# EAGLE board CT_schematic (EAGLE 7.6.0)

Size 100 x 80 mm. Coordinates in mm from the lower left corner, seen from the top.
Outline: 0,0 100,0 100,80 0,80 0,0
Copper layers (1*16): Top 0.035mm / dielectric 1.5mm / Bottom 0.035mm
Design rules "default": minimum track width 10mil, minimum drill 24mil, track to track 8mil, track to pad 8mil, pad to pad 8mil, via to via 8mil, smd to smd 8mil, copper to edge 40mil, drill to drill 8mil, minimum pad ring 10mil, minimum via ring 8mil, stop-mask expansion 4mil, vias tented up to drill 0mil, thermal gap 10mil

## Footprints (pad centres in the part's own frame; a part is rotated, then mirrored left to right if it is on the bottom)
C0603 = smd 0.8 x 0.8: 1 -0.762,0; 2 0.762,0
C0402 = smd 0.5 x 0.5: 1 -0.508,0; 2 0.508,0
C1206 = smd 1.3 x 1.6: 1 -1.524,0; 2 1.524,0
C0805 = smd 1.2 x 1.3: 1 -1.016,0; 2 1.016,0
C1210 = smd 1.2 x 2.5: 1 -1.524,0; 2 1.524,0
EXV-9H = smd 3.505 x 1.676: 1 -2.857,0; 2 2.857,0
L0603 = smd 0.8 x 0.8: 1 -0.762,0; 2 0.762,0
PJ-037B_PACKAGE = drill 3.7 square: 1 12,0 | drill 3.2 square: 2 6,0
R0603 = smd 0.8 x 0.8: 1 -0.762,0; 2 0.762,0
UFBGA176_25 = smd 0.3 x 0.3: A1 -4.55,4.55; A2 -3.9,4.55; A3 -3.25,4.55; A4 -2.6,4.55; A5 -1.95,4.55; A6 -1.3,4.55; A7 -0.65,4.55; A8 0,4.55; A9 0.65,4.55; A10 1.3,4.55; A11 1.95,4.55; A12 2.6,4.55; A13 3.25,4.55; A14 3.9,4.55; A15 4.55,4.55; B1 -4.55,3.9; B2 -3.9,3.9; B3 -3.25,3.9; B4 -2.6,3.9; B5 -1.95,3.9; B6 -1.3,3.9; B7 -0.65,3.9; B8 0,3.9; B9 0.65,3.9; B10 1.3,3.9; B11 1.95,3.9; B12 2.6,3.9; B13 3.25,3.9; B14 3.9,3.9; B15 4.55,3.9; C1 -4.55,3.25; C2 -3.9,3.25; C3 -3.25,3.25; C4 -2.6,3.25; C5 -1.95,3.25; C6 -1.3,3.25; C7 -0.65,3.25; C8 0,3.25; C9 0.65,3.25; C10 1.3,3.25; C11 1.95,3.25; C12 2.6,3.25; C13 3.25,3.25; C14 3.9,3.25; C15 4.55,3.25; D1 -4.55,2.6; D2 -3.9,2.6; D3 -3.25,2.6; D4 -2.6,2.6; D5 -1.95,2.6; D6 -1.3,2.6; D7 -0.65,2.6; D8 0,2.6; D9 0.65,2.6; D10 1.3,2.6; D11 1.95,2.6; D12 2.6,2.6; D13 3.25,2.6; D14 3.9,2.6; D15 4.55,2.6; E1 -4.55,1.95; E2 -3.9,1.95; E3 -3.25,1.95; E4 -2.6,1.95; E12 2.6,1.95; E13 3.25,1.95; E14 3.9,1.95; E15 4.55,1.95; F1 -4.55,1.3; F2 -3.9,1.3; F3 -3.25,1.3; F4 -2.6,1.3; F6 -1.3,1.3; F7 -0.65,1.3; F8 0,1.3; F9 0.65,1.3; F10 1.3,1.3; F12 2.6,1.3; F13 3.25,1.3; F14 3.9,1.3; F15 4.55,1.3; G1 -4.55,0.65; G2 -3.9,0.65; G3 -3.25,0.65; G4 -2.6,0.65; G6 -1.3,0.65; G7 -0.65,0.65; G8 0,0.65; G9 0.65,0.65; G10 1.3,0.65; G12 2.6,0.65; G13 3.25,0.65; G14 3.9,0.65; G15 4.55,0.65; H1 -4.55,0; H2 -3.9,0; H3 -3.25,0; H4 -2.6,0; H6 -1.3,0; H7 -0.65,0; H8 0,0; H9 0.65,0; H10 1.3,0; H12 2.6,0; H13 3.25,0; H14 3.9,0; H15 4.55,0; J1 -4.55,-0.65; J2 -3.9,-0.65; J3 -3.25,-0.65; J4 -2.6,-0.65; J6 -1.3,-0.65; J7 -0.65,-0.65; J8 0,-0.65; J9 0.65,-0.65; J10 1.3,-0.65; J12 2.6,-0.65; J13 3.25,-0.65; J14 3.9,-0.65; J15 4.55,-0.65; K1 -4.55,-1.3; K2 -3.9,-1.3; K3 -3.25,-1.3; K4 -2.6,-1.3; K6 -1.3,-1.3; K7 -0.65,-1.3; K8 0,-1.3; K9 0.65,-1.3; K10 1.3,-1.3; K12 2.6,-1.3; K13 3.25,-1.3; K14 3.9,-1.3; K15 4.55,-1.3; L1 -4.55,-1.95; L2 -3.9,-1.95; L3 -3.25,-1.95; L4 -2.6,-1.95; L12 2.6,-1.95; L13 3.25,-1.95; L14 3.9,-1.95; L15 4.55,-1.95; M1 -4.55,-2.6; M2 -3.9,-2.6; M3 -3.25,-2.6; M4 -2.6,-2.6; M5 -1.95,-2.6; M6 -1.3,-2.6; M7 -0.65,-2.6; M8 0,-2.6; M9 0.65,-2.6; M10 1.3,-2.6; M11 1.95,-2.6; M12 2.6,-2.6; M13 3.25,-2.6; M14 3.9,-2.6; M15 4.55,-2.6; N1 -4.55,-3.25; N2 -3.9,-3.25; N3 -3.25,-3.25; N4 -2.6,-3.25; N5 -1.95,-3.25; N6 -1.3,-3.25; N7 -0.65,-3.25; N8 0,-3.25; N9 0.65,-3.25; N10 1.3,-3.25; N11 1.95,-3.25; N12 2.6,-3.25; N13 3.25,-3.25; N14 3.9,-3.25; N15 4.55,-3.25; P1 -4.55,-3.9; P2 -3.9,-3.9; P3 -3.25,-3.9; P4 -2.6,-3.9; P5 -1.95,-3.9; P6 -1.3,-3.9; P7 -0.65,-3.9; P8 0,-3.9; P9 0.65,-3.9; P10 1.3,-3.9; P11 1.95,-3.9; P12 2.6,-3.9; P13 3.25,-3.9; P14 3.9,-3.9; P15 4.55,-3.9; R1 -4.55,-4.55; R2 -3.9,-4.55; R3 -3.25,-4.55; R4 -2.6,-4.55; R5 -1.95,-4.55; R6 -1.3,-4.55; R7 -0.65,-4.55; R8 0,-4.55; R9 0.65,-4.55; R10 1.3,-4.55; R11 1.95,-4.55; R12 2.6,-4.55; R13 3.25,-4.55; R14 3.9,-4.55; R15 4.55,-4.55
SAMTEC_FTSH-105-01-L-DV-K = smd 0.762 x 2.794: 1 -2.54,-2.032; 2 -2.54,2.032; 3 -1.27,-2.032; 4 -1.27,2.032; 5 0,-2.032; 6 0,2.032; 7 1.27,-2.032; 8 1.27,2.032; 9 2.54,-2.032; 10 2.54,2.032
RFM75-S = smd 0.85 x 1.6: 1 1.7,0.8; 2 2.97,0.8; 3 4.24,0.8; 4 5.51,0.8; 5 6.78,0.8; 6 8.05,0.8; 7 9.32,0.8; 8 10.59,0.8
S29VS256RABBHW000 = smd 0.3 x 0.3: A1 -6,3; A14 0.5,3; C3 -5,2; C4 -4.5,2; C5 -4,2; C6 -3.5,2; C7 -3,2; C8 -2.5,2; C9 -2,2; C10 -1.5,2; C11 -1,2; C12 -0.5,2; D3 -5,1.5; D4 -4.5,1.5; D5 -4,1.5; D6 -3.5,1.5; D7 -3,1.5; D8 -2.5,1.5; D9 -2,1.5; D10 -1.5,1.5; D11 -1,1.5; D12 -0.5,1.5; E3 -5,1; E4 -4.5,1; E5 -4,1; E6 -3.5,1; E7 -3,1; E8 -2.5,1; E9 -2,1; E10 -1.5,1; E11 -1,1; E12 -0.5,1; F3 -5,0.5; F4 -4.5,0.5; F5 -4,0.5; F6 -3.5,0.5; F7 -3,0.5; F8 -2.5,0.5; F9 -2,0.5; F10 -1.5,0.5; F11 -1,0.5; F12 -0.5,0.5; H1 -6,-0.5; H14 0.5,-0.5
88-00153-02 = smd 1.6 x 1.6: 1 -0.2,0; 13 15,0; 20 15,9.2; 32 -0.2,9.2 | smd 0.8 x 1.6: 2 1.4,0; 3 2.6,0; 4 3.8,0; 5 5,0; 6 6.2,0; 7 7.4,0; 8 8.6,0; 9 9.8,0; 10 11,0; 11 12.2,0; 12 13.4,0; 21 13.4,9.2; 22 12.2,9.2; 23 11,9.2; 24 9.8,9.2; 25 8.6,9.2; 26 7.4,9.2; 27 6.2,9.2; 28 5,9.2; 29 3.8,9.2; 30 2.6,9.2; 31 1.4,9.2; 49 17.8,0 | smd 1.6 x 0.8: 14 15,1.6; 15 15,2.8; 16 15,4; 17 15,5.2; 18 15,6.4; 19 15,7.6; 33 -0.2,7.6; 34 -0.2,6.4; 35 -0.2,5.2; 36 -0.2,4; 37 -0.2,2.8; 38 -0.2,1.6 | smd 2 x 2: 39 3.5,3; 40 7.4,3; 41 11.3,3; 42 11.3,6.2; 43 7.4,6.2; 44 3.5,6.2 | smd 0.5 x 0.5: 45 1.55,3.85; 46 1.55,2.75; 47 1.55,1.65 | smd 0.8 x 0.8: 48 16.6,-0.4
ABLS-25.000MHZ-B2F-T = smd 5.6 x 2.8: 1 -3.81,0; 2 5.69,0
ASEK = smd 1.4 x 1: 1 -1.1,-0.8; 2 1.1,-0.8; 3 1.1,0.8; 4 -1.1,0.8
WSON-8 = smd 0.3 x 0.6: 1 -0.75,0; 2 0.05,0; 3 0.85,0; 4 1.65,0; 5 1.65,3.8; 6 0.85,3.8; 7 0.05,3.8; 8 -0.75,3.8 | smd 3 x 2.6: PAD 0.45,1.9
SON-6 = smd 0.55 x 0.3: 1 -0.355,0.5 | smd 0.52 x 0.3: 2 -0.37,0; 3 -0.37,-0.5; 4 0.37,-0.5; 5 0.37,0; 6 0.37,0.5
RUT0012A = smd 0.7 x 0.2: 1 -0.7,0.8; 2 -0.7,0.4; 3 -0.7,0; 4 -0.7,-0.4; 5 -0.7,-0.8; 7 0.7,-0.8; 8 0.7,-0.4; 9 0.7,0; 10 0.7,0.4; 11 0.7,0.8 | smd 0.2 x 0.7: 6 0,-0.85; 12 0,0.85
SW_4-1437565-2 = smd 1.4 x 2.1: 1 -2.23,4.55; 2 -2.23,-4.55; 3 2.23,4.55; 4 2.23,-4.55
LGM67K-G1J2-24-Z = smd 0.8 x 1.4: A -2,0; C 0,0
NC7SZ125M5X = smd 1.3 x 0.7: 1 -1.3,0.95; 2 -1.3,0; 3 -1.3,-0.95; 4 1.3,-0.95; 5 1.3,0.95

## Placement (x,y rotation side)
C1  1e-06  [C0603]  -58.42,81.28 0 top  (outside the outline)
C2  1e-07  [C0603]  -62.23,81.28 0 top  (outside the outline)
C3  1e-07  [C0603]  -66.04,81.28 0 top  (outside the outline)
C4  1e-07  [C0603]  -69.85,81.28 0 top  (outside the outline)
C5  1e-07  [C0603]  -73.66,81.28 0 top  (outside the outline)
C6  1e-07  [C0603]  -77.47,81.28 0 top  (outside the outline)
C7  1e-07  [C0603]  -81.28,81.28 0 top  (outside the outline)
C8  1e-07  [C0603]  -15.24,86.36 0 top  (outside the outline)
C9  1e-07  [C0603]  -19.05,86.36 0 top  (outside the outline)
C10  1e-07  [C0603]  -22.86,86.36 0 top  (outside the outline)
C11  1e-07  [C0603]  -26.67,86.36 0 top  (outside the outline)
C12  1e-07  [C0603]  -30.48,86.36 0 top  (outside the outline)
C13  1e-07  [C0603]  -34.29,86.36 0 top  (outside the outline)
C14  1e-07  [C0603]  -38.1,86.36 0 top  (outside the outline)
C15  1e-07  [C0603]  -41.91,86.36 0 top  (outside the outline)
C16  1e-07  [C0603]  -45.72,86.36 0 top  (outside the outline)
C17  4.7e-06  [C0603]  -39.37,81.28 0 top  (outside the outline)
C18  1e-08  [C0603]  -49.53,86.36 0 top  (outside the outline)
C19  1e-06  [C0603]  -53.34,86.36 0 top  (outside the outline)
C20  2.2e-06  [C0603]  -43.18,81.28 0 top  (outside the outline)
C21  2.2e-06  [C0603]  -46.99,81.28 0 top  (outside the outline)
C22  1e-11  [C0402]  -38.1,91.44 0 top  (outside the outline)
C23  1e-11  [C0402]  -41.91,91.44 0 top  (outside the outline)
C24  1e-07  [C0402]  -45.72,91.44 0 top  (outside the outline)
C25  1e-07  [C0402]  -49.53,91.44 0 top  (outside the outline)
C26  1e-06  [C0603]  -57.15,86.36 0 top  (outside the outline)
C27  1e-07  [C0402]  -53.34,91.44 0 top  (outside the outline)
C28  2.2e-06  [C0603]  -50.8,81.28 0 top  (outside the outline)
C29  1e-07  [C0402]  -57.15,91.44 0 top  (outside the outline)
C30  2.2e-06  [C0603]  -54.61,81.28 0 top  (outside the outline)
C31  1e-07  [C0402]  -60.96,91.44 0 top  (outside the outline)
C32  1e-06  [C0603]  -60.96,86.36 0 top  (outside the outline)
C33  1e-07  [C0402]  -64.77,91.44 0 top  (outside the outline)
C34  1e-06  [C0603]  -64.77,86.36 0 top  (outside the outline)
C35  1e-08  [C0402]  -68.58,91.44 0 top  (outside the outline)
C36  1e-08  [C0402]  -72.39,91.44 0 top  (outside the outline)
C37  1e-05  [C1206]  -55.88,62.23 0 top  (outside the outline)
C38  1e-05  [C0805]  -21.59,69.85 0 top  (outside the outline)
C39  1e-08  [C0402]  -76.2,91.44 0 top  (outside the outline)
C40  1e-05  [C1206]  -62.23,62.23 0 top  (outside the outline)
C41  1e-05  [C1210]  -49.53,62.23 0 top  (outside the outline)
C42  1e-07  [C0402]  -80.01,91.44 0 top  (outside the outline)
C43  0.0001  [EXV-9H]  -58.42,54.61 0 top  (outside the outline)
C44  0.0001  [EXV-9H]  -69.85,54.61 0 top  (outside the outline)
C45  1e-08  [C0402]  -15.24,96.52 0 top  (outside the outline)
C46  1e-07  [C0402]  -19.05,96.52 0 top  (outside the outline)
C47  1e-08  [C0402]  -22.86,96.52 0 top  (outside the outline)
C48  1e-07  [C0402]  -26.67,96.52 0 top  (outside the outline)
C49  1e-08  [C0402]  -30.48,96.52 0 top  (outside the outline)
C50  1e-08  [C0402]  -34.29,96.52 0 top  (outside the outline)
C51  1e-08  [C0402]  -38.1,96.52 0 top  (outside the outline)
C52  1e-08  [C0402]  -41.91,96.52 0 top  (outside the outline)
F1  240.0  [L0603]  -68.58,86.36 0 top  (outside the outline)
J1  PJ-037B  [PJ-037B_PACKAGE]  -71.12,30.48 0 top  (outside the outline)
R2  1000.0  [R0603]  -72.39,86.36 0 top  (outside the outline)
R7  4700.0  [R0603]  -76.2,86.36 0 top  (outside the outline)
R8  4700.0  [R0603]  -80.01,86.36 0 top  (outside the outline)
R9  4700.0  [R0603]  -15.24,91.44 0 top  (outside the outline)
R10  10000.0  [R0603]  -52.07,69.85 0 top  (outside the outline)
R11  10000.0  [R0603]  -57.15,69.85 0 top  (outside the outline)
R12  10000.0  [R0603]  -62.23,69.85 0 top  (outside the outline)
R13  10000.0  [R0603]  -67.31,69.85 0 top  (outside the outline)
R14  10000.0  [R0603]  -72.39,69.85 0 top  (outside the outline)
R15  10000.0  [R0603]  -77.47,69.85 0 top  (outside the outline)
R16  10000.0  [R0603]  -15.24,76.2 0 top  (outside the outline)
R17  10000.0  [R0603]  -20.32,76.2 0 top  (outside the outline)
R18  5.0  [R0603]  -19.05,91.44 0 top  (outside the outline)
R19  10000.0  [R0603]  -25.4,76.2 0 top  (outside the outline)
R20  10000.0  [R0603]  -30.48,76.2 0 top  (outside the outline)
R21  10000.0  [R0603]  -35.56,76.2 0 top  (outside the outline)
R22  10000.0  [R0603]  -40.64,76.2 0 top  (outside the outline)
R23  10000.0  [R0603]  -45.72,76.2 0 top  (outside the outline)
R24  10000.0  [R0603]  -50.8,76.2 0 top  (outside the outline)
R25  10000.0  [R0603]  -55.88,76.2 0 top  (outside the outline)
R26  34000.0  [R0603]  -60.96,76.2 0 top  (outside the outline)
R27  34000.0  [R0603]  -66.04,76.2 0 top  (outside the outline)
R28  34000.0  [R0603]  -71.12,76.2 0 top  (outside the outline)
R29  34000.0  [R0603]  -76.2,76.2 0 top  (outside the outline)
R30  34000.0  [R0603]  -81.28,76.2 0 top  (outside the outline)
R31  34000.0  [R0603]  -15.24,81.28 0 top  (outside the outline)
R32  10000.0  [R0603]  -20.32,81.28 0 top  (outside the outline)
R33  100000.0  [R0603]  -26.67,69.85 0 top  (outside the outline)
R34  806.0  [R0603]  -22.86,91.44 0 top  (outside the outline)
R35  1000.0  [R0603]  -26.67,91.44 0 top  (outside the outline)
R36  100000.0  [R0603]  -31.75,69.85 0 top  (outside the outline)
R37  2231.0  [R0603]  -30.48,91.44 0 top  (outside the outline)
R38  1000.0  [R0603]  -34.29,91.44 0 top  (outside the outline)
R39  10000.0  [R0603]  -25.4,81.28 0 top  (outside the outline)
R40  10000.0  [R0603]  -30.48,81.28 0 top  (outside the outline)
R41  82000.0  [R0603]  -35.56,81.28 0 top  (outside the outline)
R42  300000.0  [R0603]  -36.83,69.85 0 top  (outside the outline)
R43  120000.0  [R0603]  -41.91,69.85 0 top  (outside the outline)
R44  200000.0  [R0603]  -46.99,69.85 0 top  (outside the outline)
U1  STM32F429IEH6  [UFBGA176_25]  -48.26,29.21 0 top  (outside the outline)
U2  FTSH-105-01-L-DV-K  [SAMTEC_FTSH-105-01-L-DV-K]  -35.56,31.75 0 top  (outside the outline)
U3  RFM75-S  [RFM75-S]  -26.67,3.81 0 top  (outside the outline)
U4  S29VS256RABBHW000  [S29VS256RABBHW000]  -25.4,53.34 0 top  (outside the outline)
U5  88-00153-02  [88-00153-02]  -54.61,2.54 0 top  (outside the outline)
U6  ABLS-25.000MHZ-B2F-T  [ABLS-25.000MHZ-B2F-T]  -26.67,63.5 0 top  (outside the outline)
U7  ASEK-32.768KHz-ECST  [ASEK]  -49.53,54.61 0 top  (outside the outline)
U8  LP3878SDX-ADJ/NOPB  [WSON-8]  -49.53,41.91 0 top  (outside the outline)
U9  LP3878SDX-ADJ/NOPB  [WSON-8]  -69.85,41.91 0 top  (outside the outline)
U10  TPS3895ADRYR  [SON-6]  -60.96,95.25 0 top  (outside the outline)
U11  LSF0204DRUTR  [RUT0012A]  -55.88,96.52 0 top  (outside the outline)
U12  4-1437565-2  [SW_4-1437565-2]  -27.94,44.45 0 top  (outside the outline)
U13  Q65110A2395  [LGM67K-G1J2-24-Z]  -38.1,62.23 0 top  (outside the outline)
U14  nc7sz125m5x  [NC7SZ125M5X]  -67.31,60.96 0 top  (outside the outline)
U15  nc7sz125m5x  [NC7SZ125M5X]  -73.66,60.96 0 top  (outside the outline)
U16  nc7sz125m5x  [NC7SZ125M5X]  -80.01,60.96 0 top  (outside the outline)
U17  nc7sz125m5x  [NC7SZ125M5X]  -15.24,69.85 0 top  (outside the outline)

## Library data of the parts
C1-C52 F1 J1 R2 R7-R44 U1-U17 = circuit_tree

## Nets
CLK_CRYSTAL_U1_G1: C22.1 U1.G1 U6.1
CLK_CRYSTAL_U1_H1: C23.1 U1.H1 U6.2
CLK_U1_E1: U1.E1 U7.3
GND: C1.2 C2.2 C3.2 C4.2 C5.2 C6.2 C7.2 C8.2 C9.2 C10.2 C11.2 C12.2 C13.2 C14.2 C15.2 C16.2 C17.2 C18.2 C19.2 C20.2 C21.2 C22.2 C23.2 C24.2 C25.2 C26.2 C27.2 C28.2 C29.2 C30.2 C31.2 C32.2 C33.2 C34.2 C35.2 C36.2 C37.2 C38.2 C39.2 C40.2 C41.2 C42.2 C43.2 C44.2 C45.2 C46.2 C47.2 C48.2 C49.2 C50.2 C51.2 C52.2 J1.2 R2.2 R13.2 R17.2 R18.2 R32.2 R35.2 R38.2 R41.2 R43.2 U1.D5 U1.D7 U1.D8 U1.D9 U1.F2 U1.F6 U1.F7 U1.F8 U1.F9 U1.F10 U1.F12 U1.G2 U1.G6 U1.G7 U1.G8 U1.G9 U1.G10 U1.G12 U1.H6 U1.H7 U1.H8 U1.H9 U1.H10 U1.H12 U1.J6 U1.J7 U1.J8 U1.J9 U1.J10 U1.K6 U1.K7 U1.K8 U1.K9 U1.K10 U1.M1 U1.M8 U1.M9 U1.N1 U2.3 U2.5 U3.1 U4.C5 U4.D12 U4.E3 U4.F5 U5.1 U5.9 U5.13 U5.14 U5.15 U5.16 U5.17 U5.18 U5.19 U5.20 U5.21 U5.22 U5.23 U5.24 U5.25 U5.26 U5.27 U5.31 U5.32 U5.39 U5.40 U5.41 U5.42 U5.43 U5.44 U5.49 U7.2 U8.3 U8.PAD U9.3 U9.PAD U10.2 U11.6 U13.C U14.2 U14.3 U15.1 U15.3 U16.1 U16.3 U17.1 U17.3
NET_U1_C6: R10.1 U1.C6
NET_U1_D6: R11.1 U1.D6
NET_U1_F13: C21.1 U1.F13
NET_U1_J1: R9.1 U1.J1 U17.4
NET_U1_L4: R13.1 U1.L4
NET_U1_M6: R12.1 U1.M6
NET_U1_M10: C20.1 U1.M10
NET_U1_R1: C18.1 C19.1 F1.1 U1.P1 U1.R1
NET_U1_R14: U13.A
NET_U1_R15: U12.3 U12.4
NET_U2_9: R18.1 U2.9
NET_U3_3: R19.1 U3.3
NET_U4_C9: U4.C9
NET_U4_D8: R7.1 U4.D8 U15.4
NET_U5_6: R32.1 U5.6
NET_U5_10: R8.1 U5.10 U16.4
NET_U5_11: R25.1 U5.11
NET_U8_1: C36.1 U8.1
NET_U8_6: R34.2 R35.1 U8.6
NET_U8_8: R33.1 U8.8
NET_U9_1: C39.1 U9.1
NET_U9_6: R37.2 R38.1 U9.6
NET_U9_8: R36.1 U9.8
NET_U10_1: R40.1 R41.1 U10.1
NET_U10_3: R42.2 R43.1 U10.3
NET_U10_4: R39.1 U10.4 U14.4 U15.2 U16.2 U17.2
NET_U11_12: R44.1 U11.12
NET_U12_1: R2.1 U12.1 U12.2
PROC_FMC_A16: U1.N14 U4.D4
PROC_FMC_A17: U1.N13 U4.C11
PROC_FMC_A18: U1.M15 U4.D10
PROC_FMC_A19: U1.A1 U4.C10
PROC_FMC_A20: U1.B1 U4.D5
PROC_FMC_A21: U1.B2 U4.C4
PROC_FMC_A22: U1.B3 U4.C12
PROC_FMC_A23: U1.A2 U4.D7
PROC_FMC_CLK: U1.D11 U4.C6
PROC_FMC_D0: U1.M14 U4.F3
PROC_FMC_D1: U1.L14 U4.F4
PROC_FMC_D2: U1.B12 U4.E6
PROC_FMC_D3: U1.C12 U4.E7
PROC_FMC_D4: U1.R8 U4.F8
PROC_FMC_D5: U1.P8 U4.F9
PROC_FMC_D6: U1.P9 U4.E10
PROC_FMC_D7: U1.R9 U4.E11
PROC_FMC_D8: U1.P10 U4.E4
PROC_FMC_D9: U1.R10 U4.E5
PROC_FMC_D10: U1.N11 U4.F6
PROC_FMC_D11: U1.P11 U4.F7
PROC_FMC_D12: U1.R11 U4.E8
PROC_FMC_D13: U1.P15 U4.E9
PROC_FMC_D14: U1.P14 U4.F11
PROC_FMC_D15: U1.N15 U4.F12
PROC_FMC_NE2: R22.1 U1.C10 U4.D11
PROC_FMC_NL: U1.B5 U4.D6
PROC_FMC_NOE: R24.1 U1.D10 U4.E12
PROC_FMC_NWAIT: R21.1 U1.B11 U4.C3
PROC_FMC_NWE: R23.1 U1.C11 U4.C8
PROC_SDIO_CK: R31.1 U1.A12 U5.36
PROC_SDIO_CMD: R30.1 U1.D12 U5.37
PROC_SDIO_D0: R26.1 U1.G14 U5.35
PROC_SDIO_D1: R27.1 U1.F14 U5.34
PROC_SDIO_D2: R28.1 U1.B14 U5.2
PROC_SDIO_D3: R29.1 U1.B13 U5.38
PROC_SPI1_MISO_TOIOBUF: U11.5
PROC_SPI1_MISO_TOXCVR: U3.7 U11.7
PROC_SPI1_MOSI_TOIOBUF: U11.4
PROC_SPI1_MOSI_TOXCVR: U3.6 U11.8
PROC_SPI1_NSS_TOIOBUF: U11.3
PROC_SPI1_NSS_TOXCVR: R20.1 U3.4 U11.9
PROC_SPI1_SCK_TOIOBUF: U11.2
PROC_SPI1_SCK_TOXCVR: U3.5 U11.10
PROC_SYS_JTCK_SWCLK: R17.1 U1.A14 U2.4
PROC_SYS_JTDI: R15.1 U1.A13 U2.8
PROC_SYS_JTDO_SWO: U1.A10 U2.6
PROC_SYS_JTMS_SWDIO: R16.1 U1.A15 U2.2
RST_OUT_U2_JTAG_RST_B: R14.1 U2.10 U14.1
VCC_S1_10V7: C37.1 C40.1 C43.1 C44.1 J1.1 R33.2 R36.2 U8.4 U9.4
VCC_TIER1_1V8: C1.1 C2.1 C3.1 C4.1 C5.1 C6.1 C7.1 C8.1 C9.1 C10.1 C11.1 C12.1 C13.1 C14.1 C15.1 C16.1 C17.1 C24.1 C27.1 C28.1 C29.1 C30.1 C33.1 C34.1 C38.1 C42.1 C47.1 C48.1 C49.1 C50.1 C51.1 C52.1 F1.2 R7.2 R8.2 R9.2 R10.2 R11.2 R12.2 R14.2 R15.2 R16.2 R21.2 R22.2 R23.2 R24.2 R25.2 R26.2 R27.2 R28.2 R29.2 R30.2 R31.2 R34.1 R39.2 R40.2 R42.1 R44.2 U1.C1 U1.C5 U1.C7 U1.C8 U1.C9 U1.F3 U1.G3 U1.G13 U1.H13 U1.J12 U1.J13 U1.K4 U1.N8 U1.N9 U1.N10 U2.1 U4.C7 U4.D3 U4.F10 U5.33 U8.5 U10.6 U11.1 U14.5 U15.5 U16.5 U17.5
VCC_TIER1_3V3: C25.1 C26.1 C31.1 C32.1 C35.1 C41.1 C45.1 C46.1 R19.2 R20.2 R37.1 U3.2 U5.12 U7.4 U9.5 U11.11

## Tracks (layer width: path | path; a pad name or v marks a point on that pad's centre or on a via)
CLK_CRYSTAL_U1_G1  (2 unrouted)
CLK_CRYSTAL_U1_H1  (2 unrouted)
CLK_U1_E1  (1 unrouted)
GND  (148 unrouted)
NET_U1_C6  (1 unrouted)
NET_U1_D6  (1 unrouted)
NET_U1_F13  (1 unrouted)
NET_U1_J1  (2 unrouted)
NET_U1_L4  (1 unrouted)
NET_U1_M6  (1 unrouted)
NET_U1_M10  (1 unrouted)
NET_U1_R1  (4 unrouted)
NET_U1_R15  (1 unrouted)
NET_U2_9  (1 unrouted)
NET_U3_3  (1 unrouted)
NET_U4_D8  (2 unrouted)
NET_U5_6  (1 unrouted)
NET_U5_10  (2 unrouted)
NET_U5_11  (1 unrouted)
NET_U8_1  (1 unrouted)
NET_U8_6  (2 unrouted)
NET_U8_8  (1 unrouted)
NET_U9_1  (1 unrouted)
NET_U9_6  (2 unrouted)
NET_U9_8  (1 unrouted)
NET_U10_1  (2 unrouted)
NET_U10_3  (2 unrouted)
NET_U10_4  (5 unrouted)
NET_U11_12  (1 unrouted)
NET_U12_1  (2 unrouted)
PROC_FMC_A16  (1 unrouted)
PROC_FMC_A17  (1 unrouted)
PROC_FMC_A18  (1 unrouted)
PROC_FMC_A19  (1 unrouted)
PROC_FMC_A20  (1 unrouted)
PROC_FMC_A21  (1 unrouted)
PROC_FMC_A22  (1 unrouted)
PROC_FMC_A23  (1 unrouted)
PROC_FMC_CLK  (1 unrouted)
PROC_FMC_D0  (1 unrouted)
PROC_FMC_D1  (1 unrouted)
PROC_FMC_D2  (1 unrouted)
PROC_FMC_D3  (1 unrouted)
PROC_FMC_D4  (1 unrouted)
PROC_FMC_D5  (1 unrouted)
PROC_FMC_D6  (1 unrouted)
PROC_FMC_D7  (1 unrouted)
PROC_FMC_D8  (1 unrouted)
PROC_FMC_D9  (1 unrouted)
PROC_FMC_D10  (1 unrouted)
PROC_FMC_D11  (1 unrouted)
PROC_FMC_D12  (1 unrouted)
PROC_FMC_D13  (1 unrouted)
PROC_FMC_D14  (1 unrouted)
PROC_FMC_D15  (1 unrouted)
PROC_FMC_NE2  (2 unrouted)
PROC_FMC_NL  (1 unrouted)
PROC_FMC_NOE  (2 unrouted)
PROC_FMC_NWAIT  (2 unrouted)
PROC_FMC_NWE  (2 unrouted)
PROC_SDIO_CK  (2 unrouted)
PROC_SDIO_CMD  (2 unrouted)
PROC_SDIO_D0  (2 unrouted)
PROC_SDIO_D1  (2 unrouted)
PROC_SDIO_D2  (2 unrouted)
PROC_SDIO_D3  (2 unrouted)
PROC_SPI1_MISO_TOXCVR  (1 unrouted)
PROC_SPI1_MOSI_TOXCVR  (1 unrouted)
PROC_SPI1_NSS_TOXCVR  (2 unrouted)
PROC_SPI1_SCK_TOXCVR  (1 unrouted)
PROC_SYS_JTCK_SWCLK  (2 unrouted)
PROC_SYS_JTDI  (2 unrouted)
PROC_SYS_JTDO_SWO  (1 unrouted)
PROC_SYS_JTMS_SWDIO  (2 unrouted)
RST_OUT_U2_JTAG_RST_B  (2 unrouted)
VCC_S1_10V7  (8 unrouted)
VCC_TIER1_1V8  (84 unrouted)
VCC_TIER1_3V3  (15 unrouted)